# Altium PCB FinalPCB.PcbDoc (part 4 of 4)
Units mm, origin at the board's own origin, x right, y up, seen from the top; angles counter-clockwise.
Board outline 693.67 x 556.39 mm, 2 copper layers (Top Layer, Bottom Layer); 54 components, 53 nets, 276 pads, 0 vias.
Unrouted connection lines stored in the file: 5.
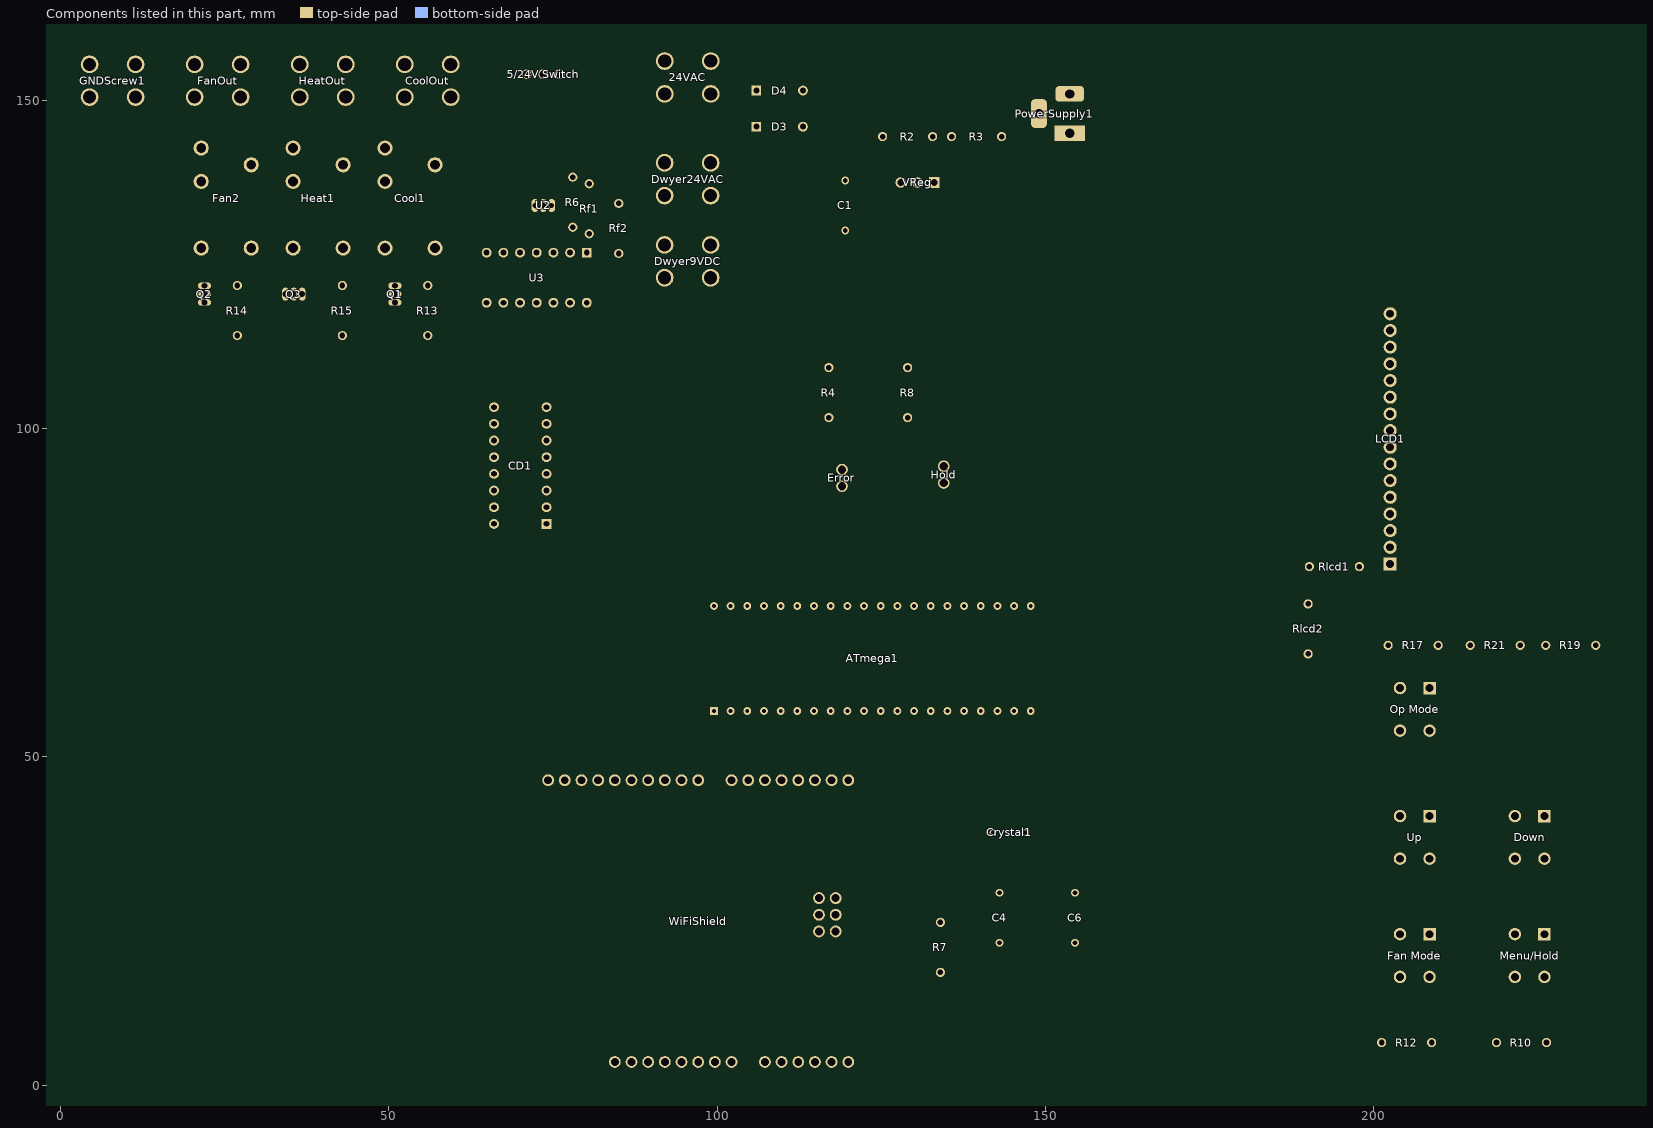
[diagram p4: the components of this part, seen from the top]

## Nets (pads, with @x,y where several pads share a name; then routed paths per layer and width w, separated by ;. In a path a pad name is that pad's centre, name@x,y a point inside that pad or via, vN(x,y) a via of type N, cw(c..) or ccw(c..) an arc to the next point about the centre after c; other vN are vias at no path point) (continued)
copper on no net: (continued)
  Top Layer w0.025: 158.495,120.076 158.495,120.177 ; 158.495,121.778 158.495,121.981 ; 158.495,123.556 158.495,123.962 ; 158.495,124.749 158.495,124.953 ; 158.495,126.045 158.495,126.35 ; 158.495,127.137 158.495,127.747 ; 158.495,128.229 158.495,128.432 ; 158.495,129.118 158.495,129.728 ; 158.495,130.109 158.495,130.82 ; 158.495,130.922 158.495,131.404 ; 158.495,133.487 158.495,133.792 ; 158.521,113.624 158.521,114.513 ; 158.521,115.326 158.521,116.215 ; 158.521,117.409 158.521,117.891 ; 158.521,118.984 158.521,119.288 ; 158.521,120.076 158.521,120.177 ; 158.521,121.778 158.521,121.981 ; 158.521,123.556 158.521,123.962 ; 158.521,124.749 158.521,124.953 ; 158.521,126.045 158.521,126.35 ; 158.521,127.137 158.521,127.747 ; 158.521,128.229 158.521,128.432 ; 158.521,129.118 158.521,129.728 ; 158.521,130.109 158.521,130.82 ; 158.521,130.922 158.521,131.404 ; 158.521,133.487 158.521,133.792 ; 158.546,113.624 158.546,114.513 ; 158.546,115.326 158.546,116.215 ; 158.546,117.409 158.546,117.891 ; 158.546,118.984 158.546,119.288 ; 158.546,120.076 158.546,120.177 ; 158.546,121.778 158.546,121.981 ; 158.546,123.556 158.546,123.962 ; 158.546,124.749 158.546,124.953 ; 158.546,126.045 158.546,126.35 ; 158.546,127.137 158.546,127.747 ; 158.546,128.229 158.546,128.432 ; 158.546,129.118 158.546,129.728 ; 158.546,130.109 158.546,130.82 ; 158.546,130.922 158.546,131.404 ; 158.546,133.487 158.546,133.792 ; 158.572,113.624 158.572,114.513 ; 158.572,115.326 158.572,116.215 ; 158.572,117.409 158.572,117.891 ; 158.572,118.984 158.572,119.288 ; 158.572,120.076 158.572,120.177 ; 158.572,121.778 158.572,121.981 ; 158.572,123.556 158.572,123.962 ; 158.572,124.749 158.572,124.953 ; 158.572,126.045 158.572,126.35 ; 158.572,127.137 158.572,127.747 ; 158.572,128.229 158.572,128.432 ; 158.572,129.118 158.572,129.728 ; 158.572,130.109 158.572,130.82 ; 158.572,130.922 158.572,131.404 ; 158.572,133.487 158.572,133.792 ; 158.597,113.624 158.597,114.513 ; 158.597,115.326 158.597,116.215 ; 158.597,117.409 158.597,117.891 ; 158.597,118.984 158.597,119.288 ; 158.597,120.076 158.597,120.177 ; 158.597,121.778 158.597,121.981 ; 158.597,123.556 158.597,123.962 ; 158.597,124.749 158.597,124.953 ; 158.597,126.045 158.597,126.35 ; 158.597,127.137 158.597,127.747 ; 158.597,128.229 158.597,128.432 ; 158.597,129.118 158.597,129.728 ; 158.597,130.109 158.597,130.82 ; 158.597,130.922 158.597,131.404 ; 158.597,133.487 158.597,133.792 ; 158.622,113.624 158.622,114.513 ; 158.622,115.326 158.622,116.215 ; 158.622,117.409 158.622,117.891 ; 158.622,118.984 158.622,119.288 ; 158.622,120.076 158.622,120.177 ; 158.622,121.778 158.622,121.981 ; 158.622,123.556 158.622,123.962 ; 158.622,124.749 158.622,124.953 ; 158.622,126.045 158.622,126.35 ; 158.622,127.137 158.622,127.747 ; 158.622,128.229 158.622,128.432 ; 158.622,129.118 158.622,129.728 ; 158.622,130.109 158.622,130.82 ; 158.622,130.922 158.622,131.404 ; 158.622,133.487 158.622,133.792 ; 158.648,113.624 158.648,114.513 ; 158.648,115.326 158.648,116.215 ; 158.648,117.409 158.648,117.891 ; 158.648,118.984 158.648,119.288 ; 158.648,120.076 158.648,120.177 ; 158.648,121.778 158.648,121.981 ; 158.648,123.556 158.648,123.962 ; 158.648,124.749 158.648,124.953 ; 158.648,126.045 158.648,126.35 ; 158.648,127.137 158.648,127.747 ; 158.648,128.229 158.648,128.432 ; 158.648,129.118 158.648,129.728 ; 158.648,130.109 158.648,130.82 ; 158.648,130.922 158.648,131.404 ; 158.648,133.487 158.648,133.792 ; 158.673,113.624 158.673,114.513 ; 158.673,115.326 158.673,116.215 ; 158.673,117.409 158.673,117.891 ; 158.673,118.984 158.673,119.288 ; 158.673,120.076 158.673,120.177 ; 158.673,121.778 158.673,121.981 ; 158.673,123.556 158.673,123.962 ; 158.673,124.749 158.673,124.953 ; 158.673,126.045 158.673,126.35 ; 158.673,127.137 158.673,127.747 ; 158.673,128.229 158.673,128.432 ; 158.673,129.118 158.673,129.728 ; 158.673,130.109 158.673,130.82 ; 158.673,130.922 158.673,131.404 ; 158.673,133.487 158.673,133.792 ; 158.699,113.624 158.699,114.513 ; 158.699,115.326 158.699,116.215 ; 158.699,117.409 158.699,117.891 ; 158.699,118.984 158.699,119.288 ; 158.699,120.076 158.699,120.177 ; 158.699,121.778 158.699,121.981 ; 158.699,123.556 158.699,123.962 ; 158.699,124.749 158.699,124.953 ; 158.699,126.045 158.699,126.35 ; 158.699,127.137 158.699,127.747 ; 158.699,128.229 158.699,128.432 ; 158.699,129.118 158.699,129.728 ; 158.699,130.109 158.699,130.82 ; 158.699,130.922 158.699,131.404 ; 158.699,133.487 158.699,133.792 ; 158.724,113.624 158.724,114.513 ; 158.724,115.326 158.724,116.215 ; 158.724,117.409 158.724,117.891 ; 158.724,118.984 158.724,119.288 ; 158.724,120.076 158.724,120.177 ; 158.724,121.778 158.724,121.981 ; 158.724,123.556 158.724,123.962 ; 158.724,124.749 158.724,124.953 ; 158.724,126.045 158.724,126.35 ; 158.724,127.137 158.724,127.747 ; 158.724,128.229 158.724,128.432 ; 158.724,129.118 158.724,129.728 ; 158.724,130.109 158.724,130.82 ; 158.724,130.922 158.724,131.404 ; 158.724,133.487 158.724,133.792 ; 158.749,113.624 158.749,114.513 ; 158.749,115.326 158.749,116.215 ; 158.749,117.409 158.749,117.891 ; 158.749,118.984 158.749,119.288 ; 158.749,120.076 158.749,120.177 ; 158.749,121.778 158.749,121.981 ; 158.749,123.556 158.749,123.962 ; 158.749,124.749 158.749,124.953 ; 158.749,126.045 158.749,126.35 ; 158.749,127.137 158.749,127.747 ; 158.749,128.229 158.749,128.432 ; 158.749,129.118 158.749,129.728 ; 158.749,130.109 158.749,130.82 ; 158.749,130.922 158.749,131.404 ; 158.749,133.487 158.749,133.792 ; 158.775,113.624 158.775,114.513 ; 158.775,115.326 158.775,116.215 ; 158.775,117.409 158.775,117.891 ; 158.775,118.984 158.775,119.288 ; 158.775,120.076 158.775,120.177 ; 158.775,121.778 158.775,121.981 ; 158.775,123.556 158.775,123.962 ; 158.775,124.749 158.775,124.953 ; 158.775,126.045 158.775,126.35 ; 158.775,127.137 158.775,127.747 ; 158.775,128.229 158.775,128.432 ; 158.775,129.118 158.775,129.728 ; 158.775,130.109 158.775,130.82 ; 158.775,130.922 158.775,131.404 ; 158.775,133.487 158.775,133.792 ; 158.8,113.624 158.8,114.513 ; 158.8,115.326 158.8,116.215 ; 158.8,117.409 158.8,118.78 ; 158.8,118.984 158.8,119.288 ; 158.8,120.076 158.8,121.473 ; 158.8,121.879 158.8,123.175 ; 158.8,123.556 158.8,124.368 ; 158.8,124.749 158.8,124.953 ; 158.8,126.248 158.8,127.442 ; 158.8,128.229 158.8,128.432 ; 158.8,129.118 158.8,129.728 ; 158.8,130.109 158.8,130.82 ; 158.8,131.023 158.8,132.395 ; 158.8,132.598 158.8,133.792 ; 158.826,113.624 158.826,114.513 ; 158.826,115.326 158.826,116.215 ; 158.826,117.409 158.826,118.78 ; 158.826,118.984 158.826,119.288 ; 158.826,120.076 158.826,121.473 ; 158.826,121.879 158.826,123.175 ; 158.826,123.556 158.826,124.368 ; 158.826,124.749 158.826,124.953 ; 158.826,126.248 158.826,127.442 ; 158.826,128.229 158.826,128.432 ; 158.826,129.118 158.826,129.728 ; 158.826,130.109 158.826,130.82 ; 158.826,131.023 158.826,132.395 ; 158.826,132.598 158.826,133.792 ; 158.851,113.624 158.851,114.513 ; 158.851,115.326 158.851,116.215 ; 158.851,117.409 158.851,118.78 ; 158.851,118.984 158.851,119.288 ; 158.851,120.076 158.851,121.473 ; 158.851,121.879 158.851,123.175 ; 158.851,123.556 158.851,124.368 ; 158.851,124.749 158.851,124.953 ; 158.851,126.248 158.851,127.442 ; 158.851,128.229 158.851,128.432 ; 158.851,129.118 158.851,129.728 ; 158.851,130.109 158.851,130.82 ; 158.851,131.023 158.851,132.395 ; 158.851,132.598 158.851,133.792 ; 158.876,113.624 158.876,114.513 ; 158.876,115.326 158.876,116.215 ; 158.876,117.409 158.876,118.78 ; 158.876,118.984 158.876,119.288 ; 158.876,120.076 158.876,121.473 ; 158.876,121.879 158.876,123.175 ; 158.876,123.556 158.876,124.368 ; 158.876,124.749 158.876,124.953 ; 158.876,126.248 158.876,127.442 ; 158.876,128.229 158.876,128.432 ; 158.876,129.118 158.876,129.728 ; 158.876,130.109 158.876,130.82 ; 158.876,131.023 158.876,132.395 ; 158.876,132.598 158.876,133.792 ; 158.902,113.624 158.902,114.513 ; 158.902,115.326 158.902,116.215 ; 158.902,117.409 158.902,118.78 ; 158.902,118.984 158.902,119.288 ; 158.902,120.177 158.902,121.168 ; 158.902,121.981 158.902,122.87 ; 158.902,123.556 158.902,124.368 ; 158.902,124.749 158.902,124.953 ; 158.902,126.35 158.902,127.137 ; 158.902,128.229 158.902,128.432 ; 158.902,129.118 158.902,129.728 ; 158.902,130.109 158.902,130.82 ; 158.902,131.404 158.902,132.115 ; 158.902,132.7 158.902,133.589 ; 158.927,113.624 158.927,114.513 ; 158.927,115.326 158.927,116.215 ; 158.927,117.409 158.927,118.78 ; 158.927,118.984 158.927,119.288 ; 158.927,120.177 158.927,121.168 ; 158.927,121.981 158.927,122.87 ; 158.927,123.556 158.927,124.368 ; 158.927,124.749 158.927,124.953 ; 158.927,126.35 158.927,127.137 ; 158.927,128.229 158.927,128.432 ; 158.927,129.118 158.927,129.728 ; 158.927,130.109 158.927,130.82 ; 158.927,131.404 158.927,132.115 ; 158.927,132.7 158.927,133.589 ; 158.953,113.624 158.953,114.513 ; 158.953,115.326 158.953,116.215 ; 158.953,117.409 158.953,118.78 ; 158.953,118.984 158.953,119.288 ; 158.953,120.177 158.953,121.168 ; 158.953,121.981 158.953,122.87 ; 158.953,123.556 158.953,124.368 ; 158.953,124.749 158.953,124.953 ; 158.953,126.35 158.953,127.137 ; 158.953,128.229 158.953,128.432 ; 158.953,129.118 158.953,129.728 ; 158.953,130.109 158.953,130.82 ; 158.953,131.404 158.953,132.115 ; 158.953,132.7 158.953,133.589 ; 158.978,113.624 158.978,114.513 ; 158.978,115.326 158.978,116.215 ; 158.978,117.409 158.978,118.78 ; 158.978,118.984 158.978,119.288 ; 158.978,120.177 158.978,121.168 ; 158.978,121.981 158.978,122.87 ; 158.978,123.556 158.978,124.368 ; 158.978,124.749 158.978,124.953 ; 158.978,126.35 158.978,127.137 ; 158.978,128.229 158.978,128.432 ; 158.978,129.118 158.978,129.728 ; 158.978,130.109 158.978,130.82 ; 158.978,131.404 158.978,132.115 ; 158.978,132.7 158.978,133.589 ; 159.003,113.624 159.003,114.513 ; 159.003,115.326 159.003,116.215 ; 159.003,117.409 159.003,118.78 ; 159.003,118.984 159.003,119.288 ; 159.003,120.177 159.003,121.168 ; 159.003,121.981 159.003,122.87 ; 159.003,123.556 159.003,124.368 ; 159.003,124.749 159.003,124.953 ; 159.003,126.35 159.003,127.137 ; 159.003,128.229 159.003,128.432 ; 159.003,129.118 159.003,129.728 ; 159.003,130.109 159.003,130.82 ; 159.003,131.404 159.003,132.115 ; 159.003,132.7 159.003,133.589 ; 159.029,113.624 159.029,114.513 ; 159.029,115.326 159.029,116.215 ; 159.029,117.409 159.029,118.78 ; 159.029,118.984 159.029,119.288 ; 159.029,120.177 159.029,121.168 ; 159.029,121.981 159.029,122.87 ; 159.029,123.556 159.029,124.368 ; 159.029,124.749 159.029,124.953 ; 159.029,126.35 159.029,127.137 ; 159.029,128.229 159.029,128.432 ; 159.029,129.118 159.029,129.728 ; 159.029,130.109 159.029,130.82 ; 159.029,131.404 159.029,132.115 ; 159.029,132.7 159.029,133.589 ; 159.054,113.624 159.054,114.513 ; 159.054,115.326 159.054,116.215 ; 159.054,117.409 159.054,118.78 ; 159.054,118.984 159.054,119.288 ; 159.054,120.177 159.054,121.168 ; 159.054,121.981 159.054,122.87 ; 159.054,123.556 159.054,124.368 ; 159.054,124.749 159.054,124.953 ; 159.054,126.35 159.054,127.137 ; 159.054,128.229 159.054,128.432 ; 159.054,129.118 159.054,129.728 ; 159.054,130.109 159.054,130.82 ; 159.054,131.404 159.054,132.115 ; 159.054,132.7 159.054,133.589 ; 159.08,113.624 159.08,114.513 ; 159.08,115.326 159.08,116.215 ; 159.08,117.409 159.08,118.78 ; 159.08,118.984 159.08,119.288 ; 159.08,120.177 159.08,121.168 ; 159.08,121.981 159.08,122.87 ; 159.08,123.556 159.08,124.368 ; 159.08,124.749 159.08,124.953 ; 159.08,126.35 159.08,127.137 ; 159.08,128.229 159.08,128.432 ; 159.08,129.118 159.08,129.728 ; 159.08,130.109 159.08,130.82 ; 159.08,131.404 159.08,132.115 ; 159.08,132.7 159.08,133.589 ; 159.105,113.624 159.105,114.513 ; 159.105,115.326 159.105,116.215 ; 159.105,117.409 159.105,118.78 ; 159.105,118.984 159.105,119.288 ; 159.105,120.177 159.105,121.168 ; 159.105,121.981 159.105,122.87 ; 159.105,123.556 159.105,124.368 ; 159.105,124.749 159.105,124.953 ; 159.105,126.35 159.105,127.137 ; 159.105,128.229 159.105,128.432 ; 159.105,129.118 159.105,129.728 ; 159.105,130.109 159.105,130.82 ; 159.105,131.404 159.105,132.115 ; 159.105,132.7 159.105,133.589 ; 159.13,113.624 159.13,114.513 ; 159.13,115.326 159.13,116.215 ; 159.13,117.409 159.13,118.78 ; 159.13,118.984 159.13,119.288 ; 159.13,120.177 159.13,121.168 ; 159.13,121.981 159.13,122.87 ; 159.13,123.556 159.13,124.368 ; 159.13,124.749 159.13,124.953 ; 159.13,126.35 159.13,127.137 ; 159.13,128.229 159.13,128.432 ; 159.13,129.118 159.13,129.728 ; 159.13,130.109 159.13,130.82 ; 159.13,131.404 159.13,132.115 ; 159.13,132.7 159.13,133.589 ; 159.156,113.624 159.156,114.513 ; 159.156,115.326 159.156,116.215 ; 159.156,117.409 159.156,118.78 ; 159.156,118.984 159.156,119.288 ; 159.156,120.177 159.156,121.168 ; 159.156,121.981 159.156,122.87 ; 159.156,123.556 159.156,124.368 ; 159.156,124.749 159.156,124.953 ; 159.156,126.35 159.156,127.137 ; 159.156,128.229 159.156,128.432 ; 159.156,129.118 159.156,129.728 ; 159.156,130.109 159.156,130.82 ; 159.156,131.404 159.156,132.115 ; 159.156,132.7 159.156,133.589 ; 159.181,113.624 159.181,114.513 ; 159.181,115.326 159.181,116.215 ; 159.181,117.409 159.181,118.78 ; 159.181,118.984 159.181,119.288 ; 159.181,120.177 159.181,121.168 ; 159.181,121.981 159.181,122.87 ; 159.181,123.556 159.181,124.368 ; 159.181,124.749 159.181,124.953 ; 159.181,126.35 159.181,127.137 ; 159.181,128.229 159.181,128.432 ; 159.181,129.118 159.181,129.728 ; 159.181,130.109 159.181,130.82 ; 159.181,131.404 159.181,132.115 ; 159.181,132.7 159.181,133.589 ; 159.207,113.624 159.207,114.513 ; 159.207,115.326 159.207,116.215 ; 159.207,117.409 159.207,118.78 ; 159.207,118.984 159.207,119.288 ; 159.207,120.177 159.207,121.168 ; 159.207,121.981 159.207,122.87 ; 159.207,123.556 159.207,124.368 ; 159.207,124.749 159.207,124.953 ; 159.207,126.35 159.207,127.137 ; 159.207,128.229 159.207,128.432 ; 159.207,129.118 159.207,129.728 ; 159.207,130.109 159.207,130.82 ; 159.207,131.404 159.207,132.115 ; 159.207,132.7 159.207,133.589 ; 159.232,113.624 159.232,114.513 ; 159.232,115.326 159.232,116.215 ; 159.232,117.409 159.232,118.78 ; 159.232,118.984 159.232,119.288 ; 159.232,120.177 159.232,121.168 ; 159.232,121.981 159.232,122.87 ; 159.232,123.556 159.232,124.368 ; 159.232,124.749 159.232,124.953 ; 159.232,126.35 159.232,127.137 ; 159.232,128.229 159.232,128.432 ; 159.232,129.118 159.232,129.728 ; 159.232,130.109 159.232,130.82 ; 159.232,131.404 159.232,132.115 ; 159.232,132.7 159.232,133.589 ; 159.257,113.624 159.257,114.513 ; 159.257,115.326 159.257,116.215 ; 159.257,117.409 159.257,118.78 ; 159.257,118.984 159.257,119.288 ; 159.257,120.177 159.257,121.168 ; 159.257,121.981 159.257,122.87 ; 159.257,123.556 159.257,124.368 ; 159.257,124.749 159.257,124.953 ; 159.257,126.35 159.257,127.137 ; 159.257,128.229 159.257,128.432 ; 159.257,129.118 159.257,129.728 ; 159.257,130.109 159.257,130.82 ; 159.257,131.404 159.257,132.115 ; 159.257,132.7 159.257,133.589 ; 159.283,113.624 159.283,114.513 ; 159.283,115.326 159.283,116.215 ; 159.283,117.409 159.283,118.78 ; 159.283,118.984 159.283,119.288 ; 159.283,120.177 159.283,121.168 ; 159.283,121.981 159.283,122.87 ; 159.283,123.556 159.283,124.368 ; 159.283,124.749 159.283,124.953 ; 159.283,126.35 159.283,127.137 ; 159.283,128.229 159.283,128.432 ; 159.283,129.118 159.283,129.728 ; 159.283,130.109 159.283,130.82 ; 159.283,131.404 159.283,132.115 ; 159.283,132.7 159.283,133.589 ; 159.308,113.624 159.308,114.513 ; 159.308,115.326 159.308,116.215 ; 159.308,117.409 159.308,118.78 ; 159.308,118.984 159.308,119.288 ; 159.308,120.177 159.308,121.168 ; 159.308,121.981 159.308,122.87 ; 159.308,123.556 159.308,124.368 ; 159.308,124.749 159.308,124.953 ; 159.308,126.35 159.308,127.137 ; 159.308,128.229 159.308,128.432 ; 159.308,129.118 159.308,129.728 ; 159.308,130.109 159.308,130.82 ; 159.308,131.404 159.308,132.115 ; 159.308,132.7 159.308,133.589 ; 159.334,113.624 159.334,114.513 ; 159.334,115.326 159.334,116.215 ; 159.334,117.409 159.334,118.78 ; 159.334,118.984 159.334,119.288 ; 159.334,120.177 159.334,121.168 ; 159.334,121.981 159.334,122.87 ; 159.334,123.556 159.334,124.368 ; 159.334,124.749 159.334,124.953 ; 159.334,126.35 159.334,127.137 ; 159.334,128.229 159.334,128.432 ; 159.334,129.118 159.334,129.728 ; 159.334,130.109 159.334,130.82 ; 159.334,131.404 159.334,132.115 ; 159.334,132.7 159.334,133.589 ; 159.359,113.624 159.359,114.513 ; 159.359,115.326 159.359,116.215 ; 159.359,117.409 159.359,118.78 ; 159.359,118.984 159.359,119.288 ; 159.359,120.177 159.359,121.168 ; 159.359,121.981 159.359,122.87 ; 159.359,123.556 159.359,124.368 ; 159.359,124.749 159.359,124.953 ; 159.359,126.35 159.359,127.137 ; 159.359,128.229 159.359,128.432 ; 159.359,129.118 159.359,129.728 ; 159.359,130.109 159.359,130.82 ; 159.359,131.404 159.359,132.115 ; 159.359,132.7 159.359,133.589 ; 159.384,113.624 159.384,114.513 ; 159.384,115.326 159.384,116.215 ; 159.384,117.409 159.384,118.78 ; 159.384,118.984 159.384,119.288 ; 159.384,120.177 159.384,121.168 ; 159.384,121.981 159.384,122.87 ; 159.384,123.556 159.384,124.368 ; 159.384,124.749 159.384,124.953 ; 159.384,126.35 159.384,127.137 ; 159.384,128.229 159.384,128.432 ; 159.384,129.118 159.384,129.728 ; 159.384,130.109 159.384,130.82 ; 159.384,131.404 159.384,132.115 ; 159.384,132.7 159.384,133.589 ; 159.41,113.624 159.41,114.513 ; 159.41,115.326 159.41,116.215 ; 159.41,117.409 159.41,118.78 ; 159.41,118.984 159.41,119.288 ; 159.41,120.177 159.41,121.168 ; 159.41,121.981 159.41,122.87 ; 159.41,123.556 159.41,124.368 ; 159.41,124.749 159.41,124.953 ; 159.41,126.35 159.41,127.137 ; 159.41,128.229 159.41,128.432 ; 159.41,129.118 159.41,129.728 ; 159.41,130.109 159.41,130.82 ; 159.41,131.404 159.41,132.115 ; 159.41,132.7 159.41,133.589 ; 159.435,113.624 159.435,114.513 ; 159.435,115.326 159.435,116.215 ; 159.461,113.624 159.461,114.513 ; 159.461,115.326 159.461,116.215 ; 159.486,113.624 159.486,114.513 ; 159.486,115.326 159.486,116.215 ; 159.511,113.624 159.511,114.513 ; 159.511,115.326 159.511,116.215 ; 159.537,113.624 159.537,114.513 ; 159.537,115.326 159.537,116.215 ; 159.562,113.624 159.562,114.513 ; 159.562,115.326 159.562,116.215 ; 159.588,113.624 159.588,114.513 ; 159.588,115.326 159.588,116.215 ; 159.613,113.624 159.613,114.513 ; 159.613,115.326 159.613,116.215 ; 159.638,113.624 159.638,114.513 ; 159.638,115.326 159.638,116.215 ; 159.664,113.624 159.664,114.513 ; 159.664,115.326 159.664,116.215 ; 159.689,113.624 159.689,114.513 ; 159.689,115.326 159.689,116.215 ; 159.715,113.624 159.715,114.513 ; 159.715,115.326 159.715,116.215 ; 159.74,113.624 159.74,114.513 ; 159.74,115.326 159.74,116.215 ; 159.765,113.624 159.765,114.513 ; 159.765,115.326 159.765,116.215 ; 159.791,113.624 159.791,114.513 ; 159.791,115.326 159.791,116.215 ; 159.816,113.624 159.816,114.513 ; 159.816,115.326 159.816,116.215 ; 159.842,113.624 159.842,114.513 ; 159.842,115.326 159.842,116.215 ; 159.867,113.624 159.867,114.513 ; 159.867,115.326 159.867,116.215 ; 159.892,113.624 159.892,114.513 ; 159.892,115.326 159.892,116.215 ; 159.918,113.624 159.918,114.513 ; 159.918,115.326 159.918,116.215 ; 159.943,113.624 159.943,114.513 ; 159.943,115.326 159.943,116.215 ; 159.969,113.624 159.969,114.513 ; 159.969,115.326 159.969,116.215 ; 159.994,113.624 159.994,114.513 ; 159.994,115.326 159.994,116.215 ; 160.019,113.624 160.019,114.513 ; 160.019,115.326 160.019,116.215 ; 160.045,113.624 160.045,114.513 ; 160.045,115.326 160.045,116.215 ; 160.07,113.624 160.07,114.513 ; 160.07,115.326 160.07,116.215 ; 160.096,113.624 160.096,114.513 ; 160.096,115.326 160.096,116.215 ; 160.121,113.624 160.121,114.513 ; 160.121,115.326 160.121,116.215 ; 160.146,113.624 160.146,114.513 ; 160.146,115.326 160.146,116.215 ; 160.172,113.624 160.172,114.513 ; 160.172,115.326 160.172,116.215 ; 160.197,113.624 160.197,114.513 ; 160.197,115.326 160.197,116.215 ; 160.223,113.624 160.223,114.513 ; 160.223,115.326 160.223,116.215 ; 160.248,113.624 160.248,114.513 ; 160.248,115.326 160.248,116.215 ; 160.273,113.624 160.273,114.513 ; 160.273,115.326 160.273,116.215 ; 160.299,113.624 160.299,114.513 ; 160.299,115.326 160.299,116.215 ; 160.324,113.624 160.324,114.513 ; 160.324,115.326 160.324,116.215 ; 160.35,113.624 160.35,114.513 ; 160.35,115.326 160.35,116.215 ; 160.375,113.624 160.375,114.513 ; 160.375,115.326 160.375,116.215 ; 160.4,113.624 160.4,114.513 ; 160.4,115.326 160.4,116.215 ; 160.426,113.624 160.426,114.513 ; 160.426,115.326 160.426,116.215 ; 160.451,113.624 160.451,114.513 ; 160.451,115.326 160.451,116.215 ; 160.477,113.624 160.477,114.513 ; 160.477,115.326 160.477,116.215 ; 160.502,113.624 160.502,114.513 ; 160.502,115.326 160.502,116.215 ; 160.527,113.624 160.527,114.513 ; 160.527,115.326 160.527,116.215 ; 160.553,113.624 160.553,114.513 ; 160.553,115.326 160.553,116.215 ; 160.578,113.624 160.578,114.513 ; 160.578,115.326 160.578,116.215 ; 160.604,113.624 160.604,114.513 ; 160.604,115.326 160.604,116.215 ; 160.629,113.624 160.629,114.513 ; 160.629,115.326 160.629,116.215 ; 160.654,113.624 160.654,114.513 ; 160.654,115.326 160.654,116.215 ; 160.68,113.624 160.68,114.513 ; 160.68,115.326 160.68,116.215 ; 160.705,113.624 160.705,114.513 ; 160.705,115.326 160.705,116.215 ; 160.731,113.624 160.731,114.513 ; 160.731,115.326 160.731,116.215 ; 160.756,113.624 160.756,114.513 ; 160.756,115.326 160.756,116.215 ; 160.781,113.624 160.781,114.513 ; 160.781,115.326 160.781,116.215 ; 160.807,113.624 160.807,114.513 ; 160.807,115.326 160.807,116.215 ; 160.832,113.624 160.832,114.513 ; 160.832,115.326 160.832,116.215 ; 160.858,113.624 160.858,114.513 ; 160.858,115.326 160.858,116.215 ; 160.883,113.624 160.883,114.513 ; 160.883,115.326 160.883,116.215 ; 160.908,113.624 160.908,114.513 ; 160.908,115.326 160.908,116.215 ; 160.934,113.624 160.934,116.215 ; 160.959,113.624 160.959,116.215 ; 160.985,113.624 160.985,116.215 ; 161.01,113.624 161.01,116.215 ; 161.035,113.624 161.035,116.215 ; 161.061,113.624 161.061,116.215 ; 161.086,113.624 161.086,116.215 ; 161.112,113.624 161.112,116.215 ; 161.137,113.624 161.137,116.215 ; 161.162,113.624 161.162,116.215 ; 161.188,113.624 161.188,116.215 ; 161.213,113.624 161.213,116.215 ; 161.239,113.624 161.239,116.215 ; 161.264,113.624 161.264,116.215 ; 161.289,113.624 161.289,116.215 ; 161.315,113.624 161.315,116.215 ; 161.34,113.624 161.34,116.215 ; 161.366,113.624 161.366,116.215 ; 161.391,113.624 161.391,116.215 ; 161.416,113.624 161.416,116.215 ; 161.442,113.624 161.442,116.215
  Top Layer w0.254: 115.76,28.5 116.406,29.146 116.406,30 ; 134.5,90.81 134.5,91.73

## Text inside footprints (layer, text, board x,y; h text height)
U2: Top Overlay "3" at 71.465,131.776 h1.5 r270; Top Overlay "1" at 74.06,131.776 h1.5 r270
VReg: Top Overlay "3" at 128.46,141.325 h1.5 r180; Top Overlay "1" at 133.29,141.325 h1.5 r180; Top Overlay "2" at 131,141.325 h1.5 r180